# Altium PCB PCB3.PcbDoc
Units mil, origin at the board's own origin, x right, y up, seen from the top; angles counter-clockwise.
Board outline 2995.03 x 3945.01 mil, 2 copper layers (Top Layer, Bottom Layer); 31 components, 31 nets, 145 pads, 34 vias.
Unrouted connection lines stored in the file: 3.
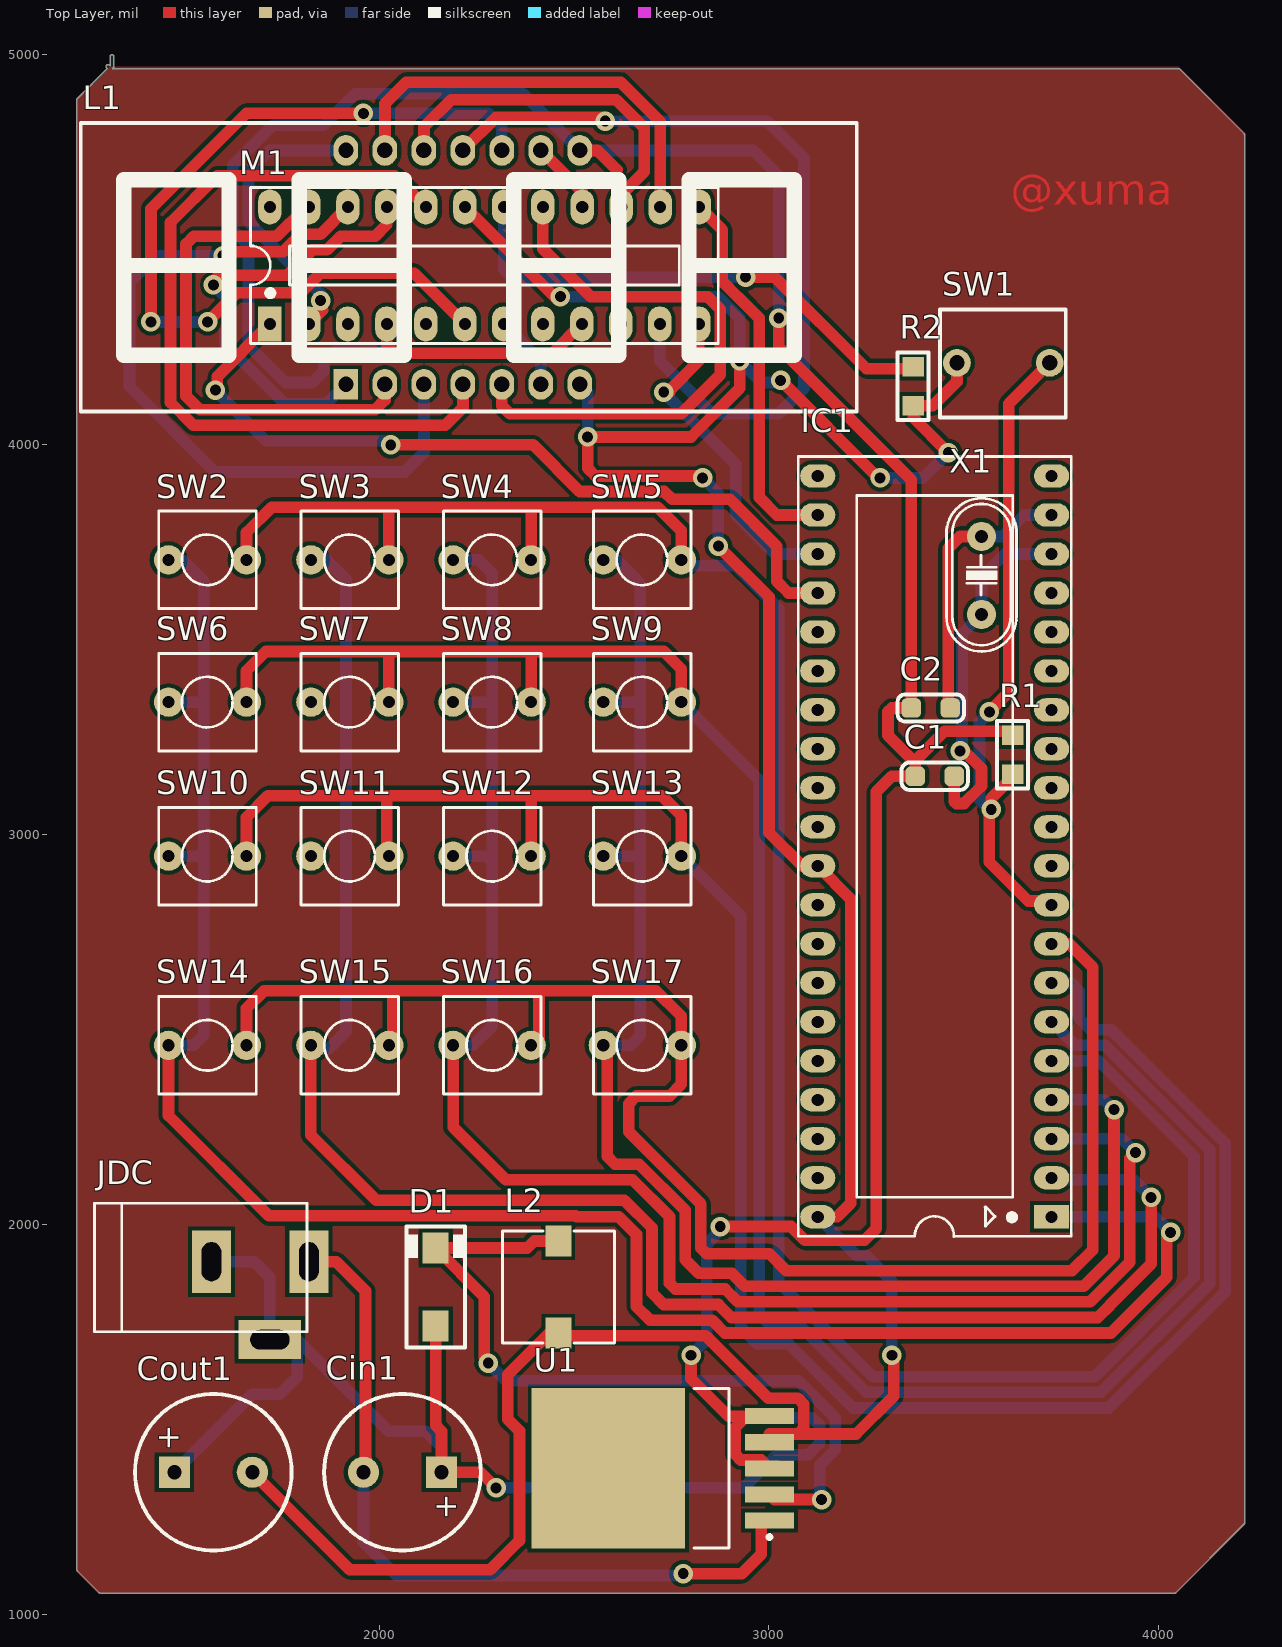
[diagram p0: Top Layer view]
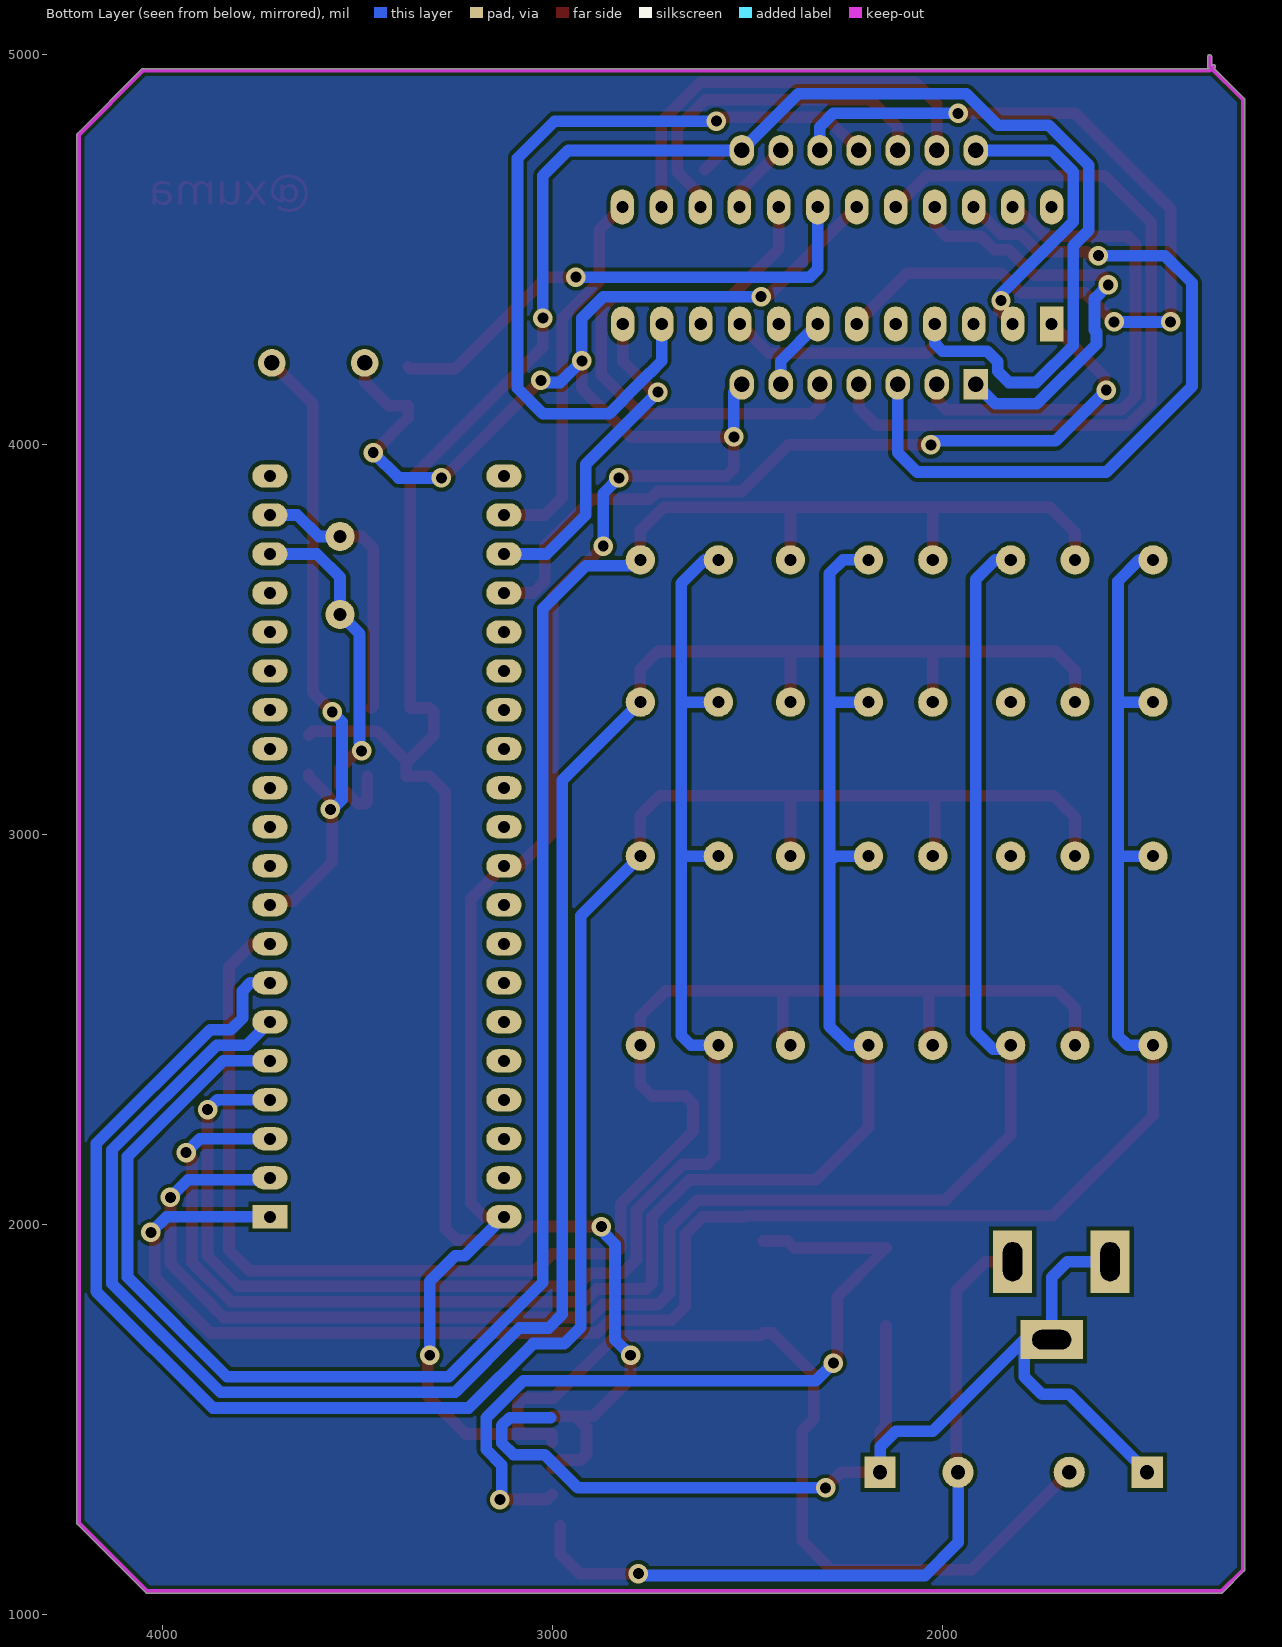
[diagram p1: Bottom Layer view, seen from below]

## Layer stack, top to bottom
Top Solder: solder mask 0.4, Solder Resist, Dk 3.5
Top Layer: signal copper 1.4
Dielectric 1: dielectric 12.6, FR-4, Dk 4.8
Bottom Layer: signal copper 1.4
Bottom Solder: solder mask 0.4, Solder Resist, Dk 3.5

## Board outline
1226.47,1111.44 cw(c1230,1115) 1224.98,1115 1224.98,4885 cw(c1230,4885) 1226.47,4888.56 1226.45,4888.55 1302.91,4965 1301.45,4966.45 cw(c1305,4970) 1308.55,4973.55 1309.98,4972.11 1309.98,4995 cw(c1315,4995) 1320.02,4995 1320.02,4970 cw(c1315,4970) 1318.53,4966.44 1318.55,4966.45 1317.11,4965.02 4050,4965.02 cw(c4050,4960) 4053.56,4963.53 4053.55,4963.55 4218.55,4798.55 4218.53,4798.56 cw(c4215,4795) 4220.02,4795 4220.02,1235 cw(c4215,1235) 4218.53,1231.44 4218.55,1231.45 4043.55,1056.45 4043.56,1056.47 cw(c4040,1060) 4040,1054.98 1285,1054.98 cw(c1285,1060) 1281.44,1056.47 1281.45,1056.45

## Design rules (kind name [scope] priority, off if disabled: settings)
Clearance [All] p1: gap=10 ignorepadtopadclearanceinfootprint=FALSE except(0: Arc-Hole Track-Hole SMDPad-Hole THPad-Hole Via-Hole Fill-Hole Poly-Hole Region-Hole Text-Hole)
PolygonConnect [All] p1: connectstyle=Relief reliefconductorwidth=10 reliefentries=4 polygonreliefangle="90 Angle" airgapwidth=10
RoutingVias [All] p1: holewidth=28 width=50 viastyle="Through Hole" minholewidth=28 minwidth=50 maxholewidth=28 maxwidth=50
SolderMaskExpansion [All] p1: expansion=4
Width [All] p1: maxlimit=40 minlimit=20 preferedwidth=30
30 further rules are at their usual default settings.

## Classes and differential pairs
component class Designator: SW2 SW3 SW4 SW5 SW6 SW7 SW8 SW9 SW10 SW11 SW12 SW13 SW14 SW15 SW16 SW17
component class "[05] - POWER": Cin1 Cout1 D1 JDC L2 U1
component class "[03] - LED7SEG": M1 R2
component class "[02] - MCU": C1 C2 IC1 R1 SW1 X1

## Components (designator, comment, footprint, x,y, rotation, side; value= is the part's Value field where it differs from the comment)
C1 "22pF" CAP_0805 3425,3150 r0 top value=103
C2 "22pF" CAP_0805 3415,3325 r0 top value=103
Cin1 "680uF" CAP_D10 2160,1365 r180 top value=100pF
Cout1 "220uF" CAP_D10 1475,1365 r0 top value=100pF
D1 "1N5822" SMA 2145,1840 r90 top value="Diode c?m 1N5408"
IC1 "AT89C52" DIP40/W0.6 3725,2020 r90 top
JDC "Jac DC" DC-IN 1695,1805 r0 top
L1 "Led 7 Seg 4 digit - Anode" LED7SEG-4-0.56-RG 2235,4450 r0 top
L2 "33uH" L-SMD-M-7.3x4.5 2460,1840 r0 top value="150 mH"
M1 "MAX7219ENG" DIP24/W0.3 1720,4310 r0 top
R1 "10k" RES_SMD_0805 3625,3205 r270 top value="R1W - 100"
R2 "10k" RES_SMD_0805 3370,4150 r270 top value="R1/4W - 1K"
SW1 "SW-2P-S" SW-2P-S 3720,4110 r180 top
SW2 "SW" SW2 1460,3705 r0 top value="SW chip 2 pin"
SW3 "SW" SW2 1825,3705 r0 top value="SW chip 2 pin"
SW4 "SW" SW2 2190,3705 r0 top value="SW chip 2 pin"
SW5 "SW" SW2 2575,3705 r0 top value="SW chip 2 pin"
SW6 "SW" SW2 1460,3340 r0 top value="SW chip 2 pin"
SW7 "SW" SW2 1825,3340 r0 top value="SW chip 2 pin"
SW8 "SW" SW2 2190,3340 r0 top value="SW chip 2 pin"
SW9 "SW" SW2 2575,3340 r0 top value="SW chip 2 pin"
SW10 "SW" SW2 1460,2945 r0 top value="SW chip 2 pin"
SW11 "SW" SW2 1825,2945 r0 top value="SW chip 2 pin"
SW12 "SW" SW2 2190,2945 r0 top value="SW chip 2 pin"
SW13 "SW" SW2 2575,2945 r0 top value="SW chip 2 pin"
SW14 "SW" SW2 1460,2460 r0 top value="SW chip 2 pin"
SW15 "SW" SW2 1825,2460 r0 top value="SW chip 2 pin"
SW16 "SW" SW2 2190,2460 r0 top value="SW chip 2 pin"
SW17 "SW" SW2 2575,2460 r0 top value="SW chip 2 pin"
U1 "LM2976" TO-263 2765,1375 r180 top
X1 "12Mhz" XT2 3545,3665 r270 top value=4Mhz

## Footprints (in the part's own frame and the unit in brackets; to place one, negate y for a bottom-side part, rotate by r counter-clockwise, add the part's x,y. Pads: shape width x height; smd on the part's side, far side on the other; paste and mask are expansions set on the pad)
CAP_0805 [mil]
  rrect50% 50x50 smd: 1(-50,0) 2(50,0)
  silkscreen extent -85,-35 85,35, body extent -40,-25 40,25, height 24
CAP_D10 [mil]
  rect 80x80 hole 36: 1(0,0)
  round 80 hole 36: 2(200,0)
  silkscreen extent -101,-201 301,201, body extent -107,-207 307,207, height 551
DC-IN [mil] "Jac DC input"
  rect 100x160 hole 50 slot 100 at 90 deg: 1(125,100) 2(-125,100)
  rect 160x100 hole 50 slot 100 at 0 deg: 3(25,-100)
  silkscreen extent -425,-80 120,250, body extent -410,-105 134,269, height 434
DIP24/W0.3 [mil] "DIP24/W.300, Pin to pin 100mil"
  rect 60x90 hole 31: 1(0,0)
  oval 60x90 hole 31: 2(100,0) 3(200,0) 4(300,0) 5(400,0) 6(500,0) 7(600,0) 8(700,0) 9(800,0) 10(900,0) 11(1000,0) 12(1100,0) 13(1101,300) 14(1001,300) 15(901,300) 16(801,300) 17(700,300) 18(600,300) 19(500,300) 20(400,300) 21(300,300) 22(200,300) 23(100,300) 24(0,300)
  silkscreen extent -50,-50 1150,350, body extent -89,-3 1181,307, height 200
DIP40/W0.6 [mil] "40 PIN, W 600mil, Pin to pin 100mil"
  rect 60x90 hole 31: 1(0,0)
  oval 60x90 hole 31: 2(100,0) 3(200,0) 4(300,0) 5(400,0) 6(500,0) 7(600,0) 8(700,0) 9(800,0) 10(900,0) 11(1000,0) 12(1100,0) 13(1200,0) 14(1300,0) 15(1400,0) 16(1500,0) 17(1600,0) 18(1700,0) 19(1800,0) 20(1900,0) 21(1900,600) 22(1800,600) 23(1700,600) 24(1600,600) 25(1500,600) 26(1400,600) 27(1300,600) 28(1200,600) 29(1100,600) 30(1000,600) 31(900,600) 32(800,600) 33(700,600) 34(600,600) 35(500,600) 36(400,600) 37(300,600) 38(200,600) 39(100,600) 40(0,600)
  silkscreen extent -50,-50 1950,650, body extent -82,-10 1982,600, height 224
L-SMD-M-7.3x4.5 [mm] "WE-PDA SMD Shielded Power Inductor, 7345"
  rect 1.7x2 smd: 1(0,3) 2(0,-3)
  silkscreen extent -3.65,-3.65 3.65,3.65, body extent -3.65,-3.65 3.65,3.65, height 4.05
LED7SEG-4-0.56-RG [mil]
  round 60 on Top Overlay: 0(-535,-205) 0(-85,-205) 0(465,-205) 0(915,-205)
  round 118.11 on Top Overlay: 0(-20,-95) 0(-20,155)
  rect 62.99x78.74 hole 39.37: 1(-320,-295)
  oval 62.99x78.74 hole 39.37: 2(-220,-295) 3(-120,-295) 4(-20,-295) 5(80,-295) 6(180,-295) 7(280,-295) 8(280,305) 9(180,305) 10(80,305) 11(-20,305) 12(-120,305) 13(-220,305) 14(-320,305)
  silkscreen extent -1000,-365 990,375, body extent -995,-370 985,378, height 565
RES_SMD_0805 [mil]
  rect 50x55 smd: 1(-50,0) 2(50,0)
  silkscreen extent -87,-40 87,39, body extent -45,-27 45,27, height 30
SMA [mm]
  rect 2x1.7 smd: 1(-2.544,0) 2(2.544,0)
  silkscreen extent -3.94,-1.9 3.94,1.91, body extent -2.87,-1.4 2.87,1.4, height 2.29
SW2 [mil] "SW button 2pin, 250x 250 mil"
  round 75 hole 31: 1(0,0) 2(200,0)
  silkscreen extent -25,-125 225,125
SW-2P-S [mm]
  round 1.8 hole 1: 1(0,-2.54) 2(6.045,-2.54)
  silkscreen extent -1.04,-6.02 7.14,1.02
TO-263 [mm]
  rect 3.2x1.05 smd: 1(-6,3.4) 2(-6,1.7) 3(-6,0) 4(-6,-1.7) 5(-6,-3.4)
  rect 10x10.45 smd: 6(4.5,0)
  silkscreen extent -6.13,-5.2 -1.1,5.2, body extent -6.58,-5.2 7.57,5.2, height 4.65
XT2 [mil] "Footpin for Crystal 2 pin"
  round 75 hole 34: 1(-100,0) 2(100,0)
  silkscreen extent -198,-90 195,90, body extent -233,-93 213,90, height 138

## Part data
C1 C2: library part C, "Cap SMD"
Cin1 Cout1: library part CAP, "Cap np  1pF - 472pF"
D1: "Schottky Rectifiers"
IC1: "Atmel AT89C52, 8k Byte Flash Memory , 40 Pin"
JDC: library part DCIN, "Jac DC input"
L1: library part LED7SEG-4-RG
L2: library part Inductor, "Inductor"
M1: "Serially Interfaced, 8-Digit LED Display Driver", Code_JEDEC=MS-001-AF, ComponentLink1Description="Manufacturer Link", ComponentLink1URL=http://www.maxim-ic.com/, ComponentLink2Description=Datasheet, ComponentLink2URL=http://pdfserv.maxim-ic.com/en/ds/MAX7219-MAX7221.pdf, DatasheetVersion=Jul-1997, LatestRevisionDate=29-May-2009, LatestRevisionNote="Component Body Added.", PackageDescription="DIP, 24-Pin, Row Spacing 7.62 mm, Pitch 2.54 mm", PackageReference=NG24A, PackageVersion=1997, Published=16-Jan-2001, Publisher="Altium Limited"
R1: library part R1W, "Resistor 1W"
R2: library part R1/4W, "Resistor 1/4W"
SW1: library part SW-2PIN-SMALL, "Switch Small 2 Pin", LatestRevisionDate=17-Jul-2002, LatestRevisionNote="Re-released for DXP Platform.", PackageReference=SPST-2, Published=24-Mar-1999, Publisher="Altium Limited"
SW2 SW3 SW4 SW5 SW6 SW7 SW8 SW9 SW10 SW11 SW12 SW13 SW14 SW15 SW16 SW17: library part SW2, "Switch button 2 pin"
U1: library part LM2596, Max Input Voltage="12 V", Max Output Current="3 (6.0 peak) A", Max Output Voltage=mV, Temperature Range="-40 to +125 degC", Category=IC-Power, Min Input Voltage=mV, Min Output Voltage=mV, Mounting Technology="Surface Mount", Status=Unreleased, Supply Voltage=mV
X1: library part XT2, "Crystal For all Crystal 2pin."

## Via types
v1: diameter 50, hole 28, Top Layer to Bottom Layer, 34 vias

## Nets (pads, with @x,y where several pads share a name; then routed paths per layer and width w, separated by ;. In a path a pad name is that pad's centre, name@x,y a point inside that pad or via, vN(x,y) a via of type N, cw(c..) or ccw(c..) an arc to the next point about the centre after c; other vN are vias at no path point)
+5: Cout1.2 IC1.31 IC1.40 L1.7 L2.2 M1.19 R2.2 SW1.2 U1.4 | length 8212.2
  Top Layer w30: Cout1.2 1925,1115 2285,1115 2360,1190 2360,1471.25 2330,1501.25 2330,1615 2436.89,1721.89 L2.2 2466.89,1715 2837.4,1715 2997.87,1554.53 3074.57,1554.53 3089.21,1539.88 3089.21,1477.83 3081.89,1470.51 3089.21,1463.19 ; M1.19 2450,4380 v1(2465,4380) ; v1(2535,4020) 2535,3940 2555,3920 2825,3920 v1(2830,3915) ; v1@2545,4020 2800,4020 2925,4145 2925,4190 ; v1(2870,3740) 3000,3610 3000,3005 3085,2920 IC1.31 3210,2835 3210,2055 3175,2020 IC1.40 ; U1.4 3001.22,1463.19 3089.21,1463.19 ; v1(3030,4165) v1@3275,3920 ; v1@3320,1645 3320,1560 3223.19,1463.19 3089.21,1463.19 ; v1(3460,3980) 3370,4070 R2.2 3420,4100 3482,4162 SW1.2
  Bottom Layer w30: v1(2465,4380) 2870,4380 2925,4325 v1(2925,4215) 2980,4160 v1@3020,4160 ; L1.7 2535,4135 v1(2535,4020) ; v1(2830,3915) 2870,3875 v1@2870,3755 ; IC1.40 3225,1920 3250,1920 3315,1855 v1(3315,1665) ; v1(3285,3915) 3395,3915 v1(3460,3980) v1@3465,3985
D0: L1.14 M1.2 | length 757.8
  Top Layer w30: M1.2 1855,4345 1850,4350 v1(1850,4370)
  Bottom Layer w30: v1(1850,4370) 1850,4382.78 1852.22,4385 1665,4572.22 1665,4700 1720,4755 L1.14
D1: L1.11 M1.11 | length 2082.8
  Top Layer w30: L1.11 2300,4840 v1@2575,4840
  Bottom Layer w30: v1(2580,4830) 2995,4830 3090,4735 3090,4145 3025,4080 2855,4080 2780,4155 2780,4155.71 2750.71,4185 2750,4185 2720,4215 M1.11
D2: L1.10 M1.6 | length 2252.5
  Top Layer w30: v1(1415,4315) 1415,4605 1660,4850 v1(1960,4850) ; v1@1570,4325 1635,4390 1799.29,4390 1849.29,4440 2090,4440 M1.6
  Bottom Layer w30: v1@1425,4315 v1(1560,4315) ; v1(1960,4850) 2280,4850 2315,4815 L1.10
D3: L1.6 M1.7 | length 194.4
  Bottom Layer w30: M1.7 2415,4215 L1.6
GND: C1.1 C2.1 Cin1.1 Cout1.1 D1.1 JDC.2 JDC.3 L1.8 M1.4 M1.9 R1.1 U1.3 U1.5 | length 10826.6
  Top Layer w30: M1.4 2020,4255 2040,4235 2445,4235 M1.9 ; D1.1 2145,1485 2160,1470 Cin1.1 2260,1365 v1@2285,1340 ; L1.8 2560,4755 2610,4705 ; v1@2800,1650 2800,1605 2896.14,1508.86 U1.5 ; v1(2875,1995) 3057.22,1995 3092.22,1960 3245,1960 3275,1990 3275,3110 3315,3150 C1.1 3375,3185 ; 2936.69,1503.19 2913.23,1479.73 2913.23,1410.9 2927.87,1396.26 2979.96,1396.26 U1.3 ; v1(3025,4325) 3025,4250 3365,3910 C2.1 3315,3325 3305,3315 3305,3255 3375,3185 ; R1.1 3615,3265 3450,3265 3375,3190 3375,3185
  Bottom Layer w30: Cout1.1 1675,1565 1745,1565 1790,1610 JDC.3@1790,1705 ; JDC.2 1680,1905 1720,1865 JDC.3 JDC.3@1790,1705 ; M1.4 2020,4260 2000,4240 1885,4240 1858.5,4213.5 1858.5,4188.5 1830,4160 1759.64,4160 1665,4254.64 1665,4510.71 1625,4550.71 1625,4716.57 1727.8,4819.37 1858.66,4819.37 1939.29,4900 2370,4900 L1.8 2960,4755 3025,4690 v1(3025,4325) ; Cin1.1 2160,1430 2120,1470 2025,1470 JDC.3@1790,1705 ; v1(2300,1325) 2935,1325 3020,1410 3100,1410 3130,1440 3130,1485 3110,1505 3005,1505 ; v1(2800,1665) 2840,1705 2840,1950 v1@2865,1975
NetC1_2: C1.2 IC1.18 X1.2 | length 924.9
  Top Layer w30: C1.2 3475,3085 3480,3080 3500,3080 3545,3125 3545,3170 3500,3215 v1(3490,3215)
  Bottom Layer w30: v1@3495,3235 3495,3515 X1.2 3545,3660 3605,3720 IC1.18
NetC2_2: C2.2 IC1.19 X1.1 | length 712.3
  Top Layer w30: C2.2 3460,3330 3460,3735 3490,3765 X1.1
  Bottom Layer w30: X1.1 3600,3765 3655,3820 IC1.19
NetCin1_2: Cin1.2 JDC.1 U1.1 | length 1962.1
  Top Layer w30: JDC.1 1890,1905 1965,1830 1965,1370 Cin1.2 ; v1(2780,1105) 2930,1105 2980,1155 U1.1@2980,1228.07
  Bottom Layer w30: Cin1.2 1960,1185 2045,1100 v1@2770,1100
NetD1_2: D1.2 L2.1 U1.2 | length 1955.2
  Top Layer w30: v1@2275,1655 2270,1660 2270,1815.16 D1.2 2380.16,1940.16 2398.11,1958.11 L2.1 ; U1.2 3014.29,1295 v1(3135,1295)
  Bottom Layer w30: v1(2280,1645) 2325,1600 3075,1600 3170,1505 3170,1423.43 3130,1383.43 v1@3130,1315
NetIC1_1: IC1.1 SW2.1 SW6.1 SW10.1 SW14.1 | length 5123.5
  Top Layer w30: SW14.1 1460,2280 1717.52,2022.48 2503.82,2022.48 2506.3,2020 2615,2020 2660,1975 2660,1790 2695,1755 2853.97,1755 2887.08,1721.89 3876.89,1721.89 4020,1865 v1@4020,1970
  Bottom Layer w30: SW14.1 1525,2460 1550,2485 1550,2945 ; SW10.1 1550,2945 ; SW6.1 1550,3340 ; SW2.1 1495,3705 1550,3650 1550,3340 ; IC1.1 3990,2020 v1(4030,1980) ; 1550,2945 1550,3340
NetIC1_2: IC1.2 SW3.1 SW7.1 SW11.1 SW15.1 | length 4563.8
  Top Layer w30: SW15.1 1825,2230 1992.52,2062.48 2629.09,2062.48 2700,1991.57 2700,1825 2730,1795 2870.54,1795 2903.65,1761.89 3843.46,1761.89 3875,1793.43 3875,1795 3980,1900 v1(3980,2070)
  Bottom Layer w30: SW15.1 1835,2450 1870,2450 1915,2495 1915,3655 1865,3705 SW3.1 ; IC1.2 3730,2115 3935,2115 v1(3980,2070)
NetIC1_3: IC1.3 SW4.1 SW8.1 SW12.1 SW16.1 | length 4395.7
  Top Layer w30: SW16.1 2190,2250 2325,2115 2650,2115 2745,2020 2745,1850 2760,1835 2887.11,1835 2920.22,1801.89 3823.46,1801.89 3925,1903.43 3925,2170 v1(3940,2185)
  Bottom Layer w30: SW16.1 2241,2460 2290,2509 2290,2930 ; SW12.1 2275,2945 2290,2930 ; SW8.1 2280,3340 2290,3330 ; SW4.1 2255,3705 2290,3670 2290,3330 ; IC1.3 3905,2220 v1(3940,2185) ; 2290,2930 2290,3330
NetIC1_4: IC1.4 SW5.1 SW9.1 SW13.1 SW17.1 | length 3962.5
  Top Layer w30: SW17.1 2585,2450 2585,2175 2605,2155 2666.57,2155 2785,2036.57 2785,1910 2820,1875 2905,1875 2938.11,1841.89 3806.89,1841.89 3885,1920 v1(3885,2295)
  Bottom Layer w30: SW17.1 2645,2460 2670,2485 2670,2955 ; SW13.1 2660,2945 2670,2955 ; SW9.1 2660,3340 2670,3330 ; SW5.1 2610,3705 2670,3645 2670,3330 ; IC1.4 3860,2320 v1(3885,2295) ; 2670,2955 2670,3330
NetIC1_5: IC1.5 SW2.2 SW3.2 SW4.2 SW5.2 | length 5663.3
  Top Layer w30: SW2.2 1660,3775 1725,3840 2025,3840 ; SW3.2 2025,3840 ; SW4.2 2390,3830 2400,3840 ; SW5.2 2775,3780 2715,3840 2400,3840 ; 2025,3840 2400,3840
  Bottom Layer w30: SW5.2 2790,3690 2915,3690 3025,3580 3025,1851.57 3266.57,1610 3835,1610 4090,1865 4090,2175 3845,2420 IC1.5
NetIC1_6: IC1.6 SW6.2 SW7.2 SW8.2 SW9.2 | length 5469.5
  Top Layer w30: SW6.2 1660,3420 1710,3470 2025,3470 ; SW7.2 2025,3470 ; SW8.2 2390,3470 ; SW9.2 2775,3425 2730,3470 2390,3470 ; 2025,3470 2390,3470
  Bottom Layer w30: SW9.2 2975,3140 2975,1770 3010,1735 3085,1735 3250,1570 3851.57,1570 4130,1848.43 4130,2191.57 3861.57,2460 3785,2460 IC1.6
NetIC1_7: IC1.7 SW10.2 SW11.2 SW12.2 SW13.2 | length 5434.6
  Top Layer w30: SW10.2 1660,3045 1715,3100 2020,3100 ; SW11.2 2020,2950 2020,3100 ; SW12.2 2390,3100 ; SW13.2 2775,3050 2725,3100 2390,3100 ; 2020,3100 2390,3100
  Bottom Layer w30: SW13.2 2927.87,2792.13 2927.87,1737.13 2970,1695 3050,1695 3215,1530 3871.57,1530 4170,1828.43 4170,2208.14 3878.14,2500 3825,2500 3795,2530 3795,2600 3775,2620 IC1.7
NetIC1_8: IC1.8 SW14.2 SW15.2 SW16.2 SW17.2 | length 4231.2
  Top Layer w30: SW14.2 1660,2555 1705,2600 2035,2600 ; SW15.2 2035,2470 2035,2600 ; SW16.2 2410,2480 2410,2600 ; IC1.8 3770,2720 3830,2660 3830,1935 3776.89,1881.89 3044.38,1881.89 3001.27,1925 2840.16,1925 2825,1940.16 2825,2053.14 2640,2238.14 2640,2310 2660,2330 2745,2330 2775,2360 SW17.2 2775,2535 2710,2600 2410,2600 ; 2035,2600 2410,2600
NetIC1_9: IC1.9 R1.2 SW1.1 | length 1664.1
  Top Layer w30: v1@3570,3320 3615,3365 3615,4105 SW1.1 ; R1.2 3625,3148.43 3570,3093.43 v1(3570,3065) 3565,3060 3565,2930 3665,2830 3715,2830 IC1.9
  Bottom Layer w30: v1@3555,3075 3540,3090 3540,3290 v1(3565,3315)
NetIC1_22: IC1.22 M1.13 | length 977.8
  Top Layer w30: M1.13 2880,4551 2880,4419.29 2919.29,4380 2920,4380 2975,4325 2975,3865 3020,3820 IC1.22
NetIC1_23: IC1.23 M1.12 | length 849.1
  Top Layer w30: v1@2745,4135 2745,4140 2820,4215 M1.12
  Bottom Layer w30: v1(2730,4135) 2915,3950 2915,3820 3015,3720 IC1.23
NetIC1_24: IC1.24 M1.1 | length 2009.9
  Top Layer w30: v1@1585,4155 1585,4175 M1.1 ; v1(2030,4000) 2395,4000 2515,3880 2731.57,3880 2751.57,3860 2900,3860 3020,3740 3020,3650 3050,3620 IC1.24
  Bottom Layer w30: v1(1580,4140) 1710,4010 v1@2020,4010
NetL1_1: L1.1 M1.21 | length 1112.7
  Top Layer w30: v1@1575,4420 1590,4435 1765,4435 1830,4500 1866.57,4500 1901.57,4535 1990,4535 2020,4565 M1.21
  Bottom Layer w30: v1(1575,4410) 1610,4375 1610,4294.29 1605,4289.29 1605,4258.08 1758.08,4105 1865,4105 L1.1
NetL1_2: L1.2 M1.23 | length 1320.8
  Top Layer w30: M1.23 1810,4610 1810,4607.22 1737.78,4535 1525,4535 1505,4515 1505,4125 1540,4090 1990,4090 2015,4115 L1.2
NetL1_3: L1.3 M1.22 | length 1947.6
  Top Layer w30: v1(1600,4485) 1620,4485 1630,4495 1754.35,4495 1799.35,4540 1850,4540 M1.22
  Bottom Layer w30: v1(1600,4485) 1430,4485 1360,4415 1360,4150 1580,3930 2065,3930 2115,3980 L1.3
NetL1_4: L1.4 M1.20 | length 2052.3
  Top Layer w30: M1.20 2040,4690 1585,4690 1465,4570 1465,4108.43 1523.43,4050 2170,4050 2215,4095 L1.4
NetL1_5: L1.5 M1.17 | length 1458.9
  Top Layer w30: L1.5 2315,4100 2335,4080 2775,4080 2875,4180 2875,4347.78 2842.78,4380 2542.78,4380 2420,4502.78 M1.17
NetL1_9: L1.9 M1.16 | length 188.9
  Top Layer w30: L1.9 2521,4649 M1.16
NetL1_12: L1.12 M1.15 | length 911.5
  Top Layer w30: L1.12 2115,4815 2185,4885 2608.43,4885 2680,4813.43 2680,4700 2621,4641 M1.15
NetL1_13: L1.13 M1.14 | length 1109.6
  Top Layer w30: L1.13 2015,4875 2070,4930 2620,4930 2721,4829 M1.14
NetM1_18: M1.18 R2.1 | length 1317.7
  Top Layer w30: v1(2940,4430) 3015,4430 3250,4195 3365,4195 R2.1
  Bottom Layer w30: M1.18 2320,4450 2340,4430 v1(2940,4430)
pads on no net: IC1.10 IC1.11 IC1.12 IC1.13 IC1.14 IC1.15 IC1.16 IC1.17 IC1.20 IC1.21 IC1.25 IC1.26 IC1.27 IC1.28 IC1.29 IC1.30 IC1.32 IC1.33 IC1.34 IC1.35 IC1.36 IC1.37 IC1.38 IC1.39 L1.0 M1.3 M1.5 M1.8 M1.10 M1.24 U1.6

## Polygon pours and split planes (outlines as drawn)
no net on Top Layer "GND_BOTTOM" (solid, pour order 0): 1225,4885 1225,1110 1280,1055 4045,1055 4220,1230 4220,4800 4050,4970 1310,4970
no net on Bottom Layer "GND_BOTTOM" (solid, pour order 2): 1325,4960 1245,4880 1230,4880 1230,1125 1285,1070 1285,1060 4040,1060 4215,1235 4215,4775 4050,4940 4050,4960 1315,4960 1305,4970

## Keep-outs
Bottom Layer:
  lines w10: 1305,4970 1315,4960 4050,4960 4215,4795 4215,1235 4040,1060 1285,1060 1230,1115 1230,4885 1315,4970 1315,4995

## Other copper
Top Layer:
  text "@xuma" at 3620,4615 h80

## Text inside footprints (layer, text, board x,y; h text height)
Cin1: Top Overlay "+" at 2129,1310 h100 r270
Cout1: Top Overlay "+" at 1506,1420 h100 r90